# Altium PCB Desafio_HW_Sillion.PcbDoc
Units mm, origin at the board's own origin, x right, y up, seen from the top; angles counter-clockwise.
Board outline 81.03 x 63.37 mm, 2 copper layers (Top Layer, Bottom Layer); 42 components, 35 nets, 136 pads, 18 vias.
Unrouted connection lines stored in the file: 2.
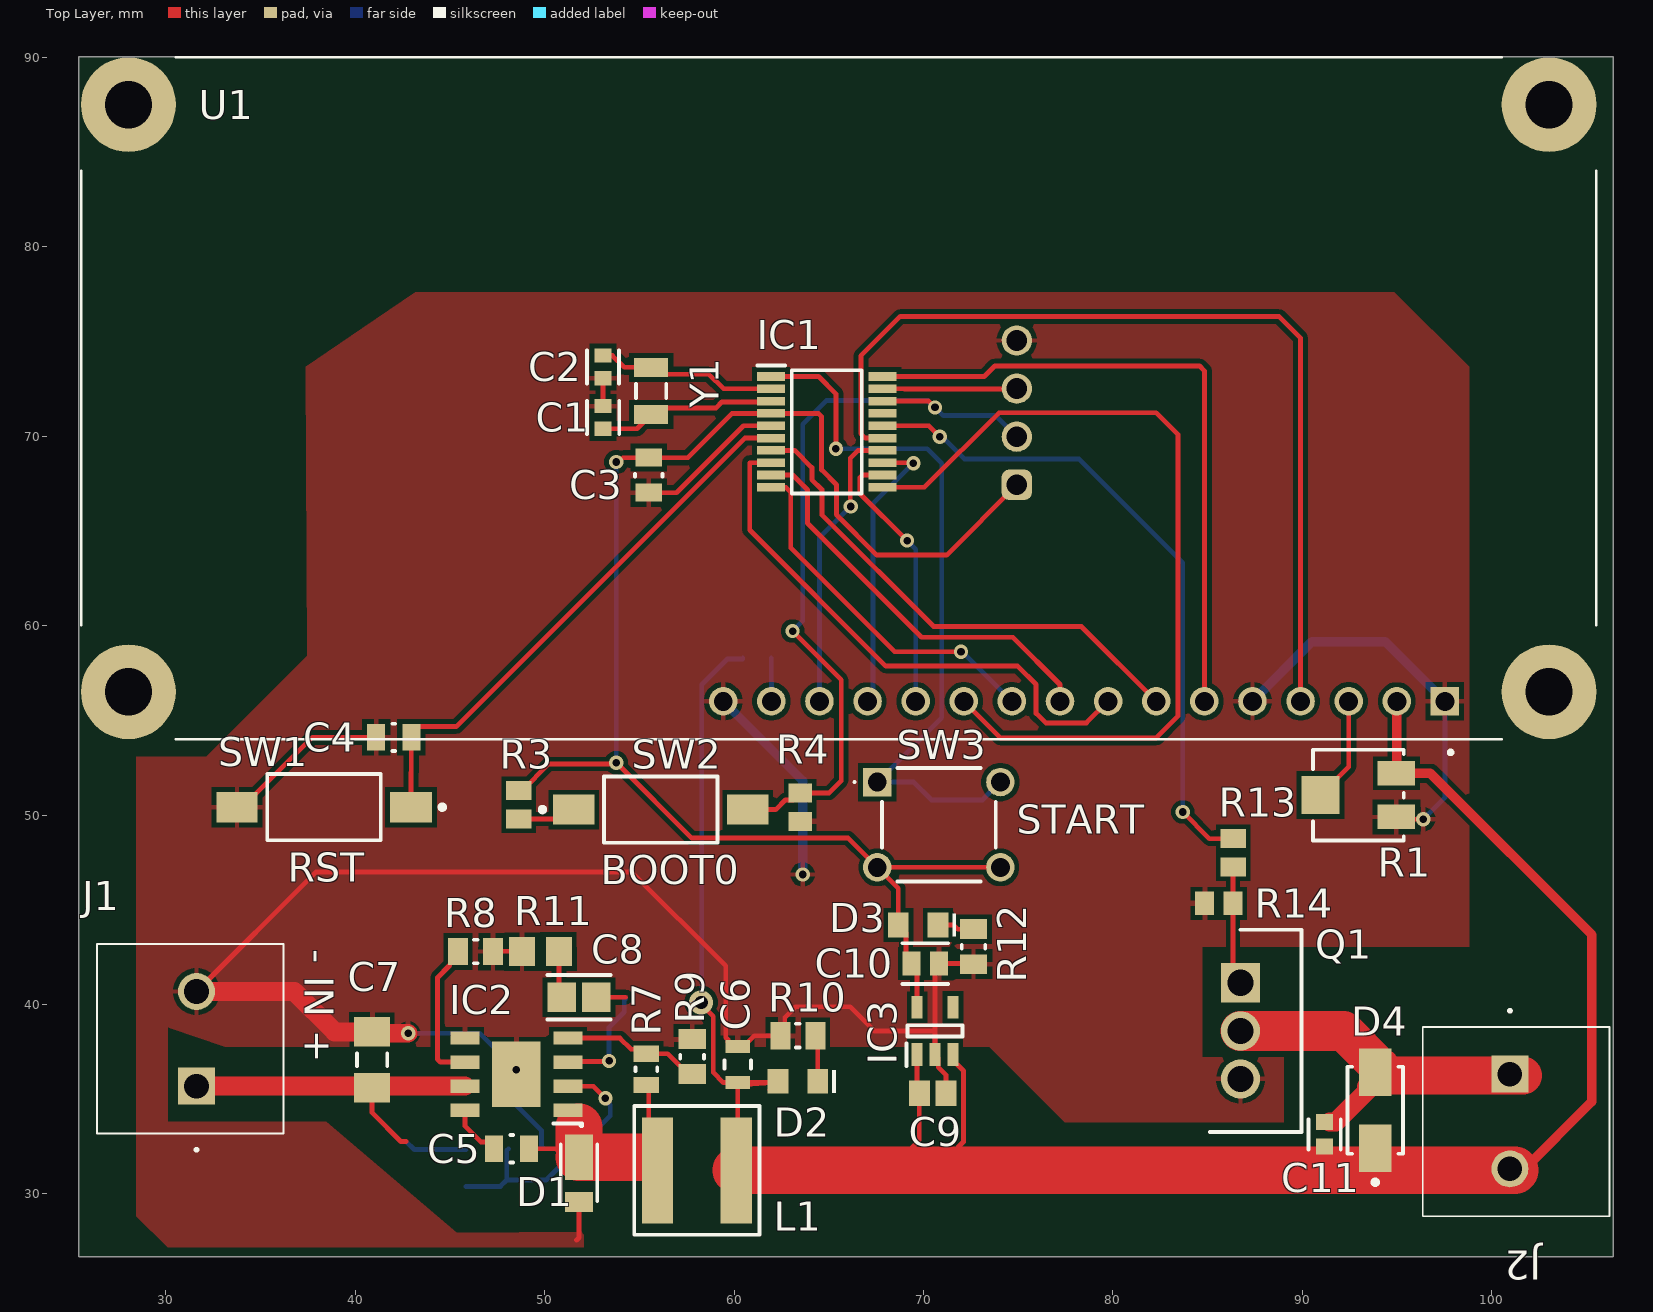
[diagram p0: Top Layer view]
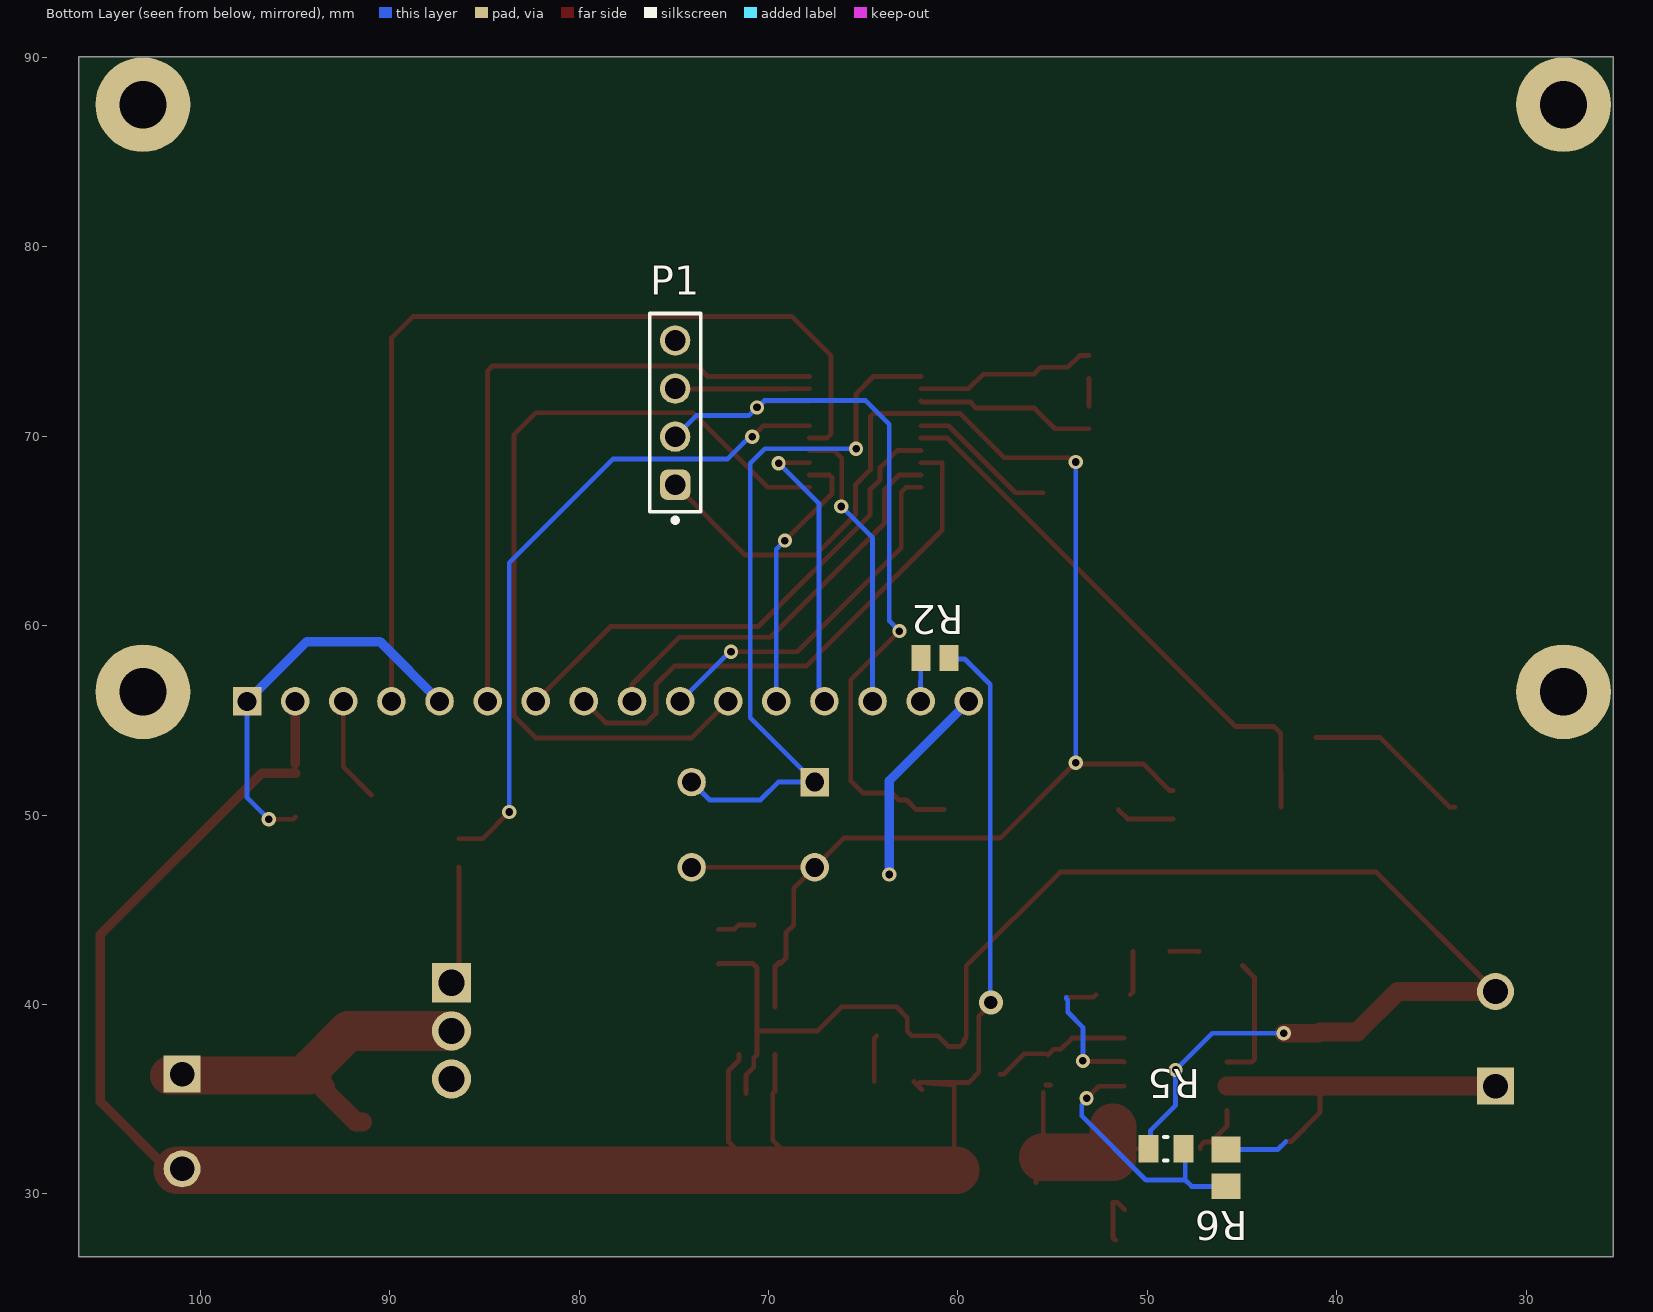
[diagram p1: Bottom Layer view, seen from below]
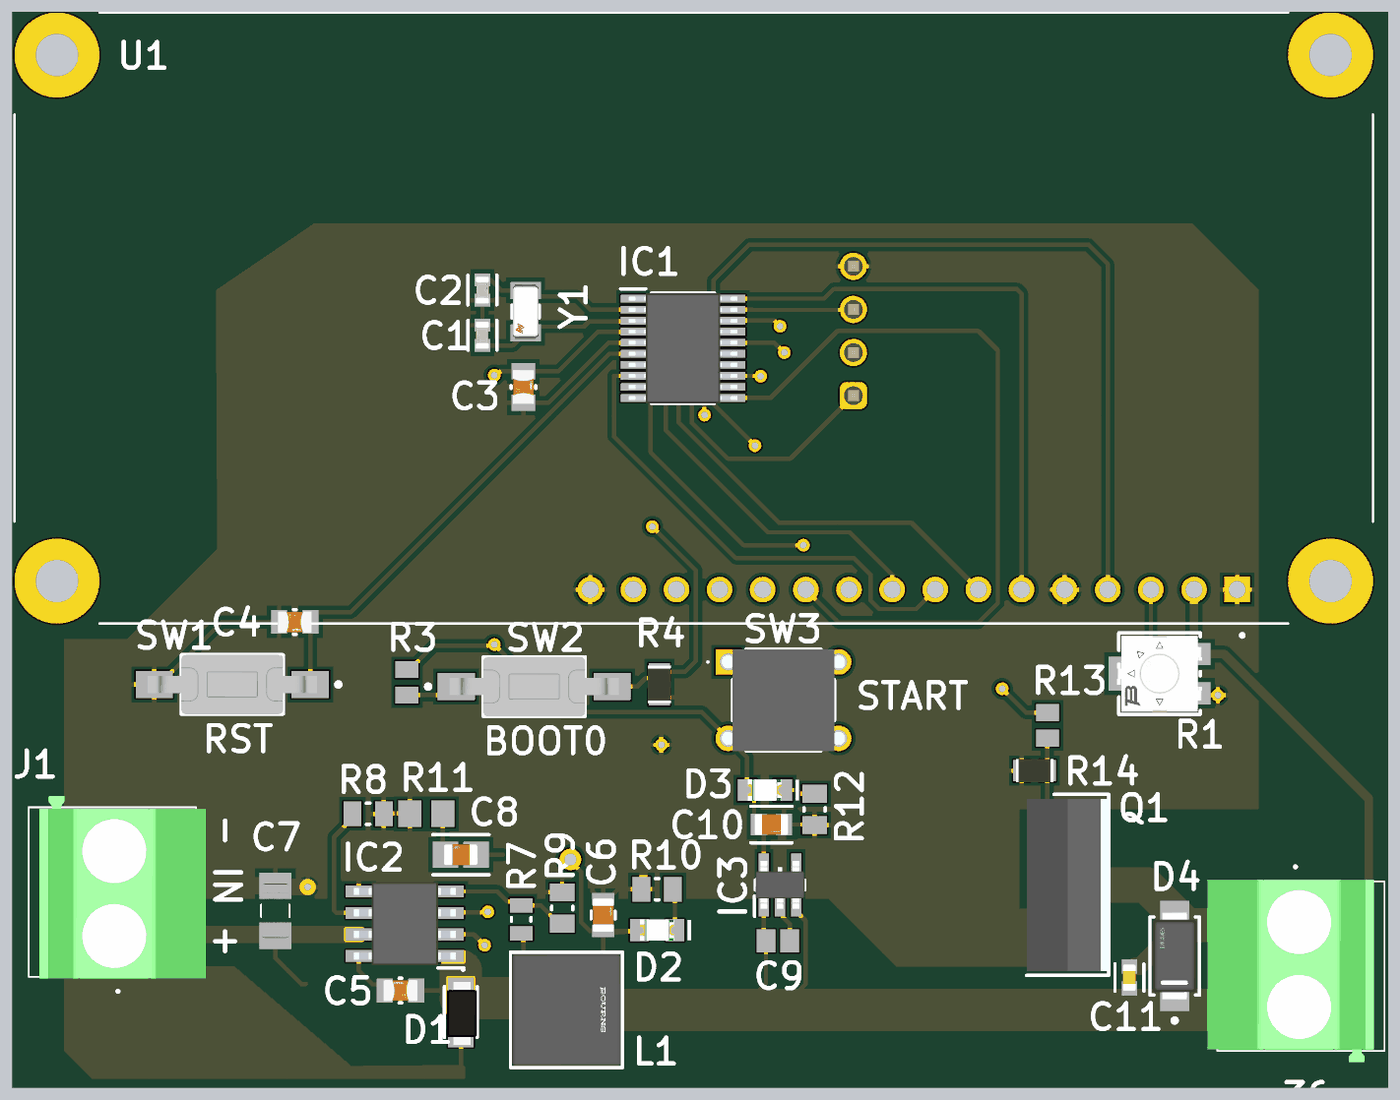
[diagram p2: 3D render of the assembled board from above, using the file's embedded part models]

## Layer stack, top to bottom
Top Solder: solder mask 0.0102, Solder Resist, Dk 3.5
Top Layer: signal copper 0.0356
Dielectric 1: dielectric 0.32, FR-4, Dk 4.8
Bottom Layer: signal copper 0.0356
Bottom Solder: solder mask 0.0102, Solder Resist, Dk 3.5

## Board outline
25.4,26.67 25.4,90.043 106.426,90.043 106.426,26.67

## Design rules (kind name [scope] priority, off if disabled: settings)
Clearance [All] p1: gap=0.254 ignorepadtopadclearanceinfootprint=FALSE
ComponentClearance ComponentClearance_1 [InComponent('U1')] p1: gap=0 collisioncheckmode=3 verticalgap=0 showdistances=FALSE donotcheckwithout3dbody=TRUE
ComponentClearance [All] p2: gap=0.254 collisioncheckmode=3 verticalgap=0.254 showdistances=FALSE
PolygonConnect [All] p1: connectstyle=Relief reliefconductorwidth=0.254 reliefentries=4 polygonreliefangle="90 Angle" airgapwidth=0.254
RoutingVias RoutingVias_1 [All] p1: holewidth=0.4 width=0.75 viastyle="Through Hole" minholewidth=0.4 minwidth=0.75 maxholewidth=0.4 maxwidth=0.75
RoutingVias [All] p2: holewidth=0.711 width=1.27 viastyle="Through Hole" minholewidth=0.711 minwidth=1.27 maxholewidth=0.711 maxwidth=1.27
SolderMaskExpansion [All] p1: expansion=0.102 istentingtop=FALSE
SupplyNets "Schematic Supply Nets_2" [InNet('GND')] p1: voltage=0.000
SupplyNets "Schematic Supply Nets_1" [InNet('3V3')] p2: voltage=0.000
SupplyNets "Schematic Supply Nets" [InNet('5V')] p3: voltage=0.000
Width [All] p1: maxlimit=2.5 minlimit=0.2 preferedwidth=0.254 minimp=50.000000 maximp=50.000000 favimp=50.000000
29 further rules are at their usual default settings.

## Classes and differential pairs
component class PWR: C5 C6 C7 C8 C9 C10 D1 D2 D3 IC2 IC3 J1 L1 R5 R6 R7 R8 R9 R10 R11 R12
component class MCU: C1 C2 C3 C4 C11 D4 IC1 J2 P1 Q1 R1 R2 R3 R4 R13 R14 SW1 SW2 SW3 U1 Y1

## Components (designator, comment, footprint, x,y, rotation, side; value= is the part's Value field where it differs from the comment)
C1 "12pF" FP-C0603C-CF-MFG 53.086,70.993 r90 top value="12 pF"
C2 "12pF" FP-C0603C-CF-MFG 53.086,73.66 r270 top value="12 pF"
C3 "100nF" FP-CC0805-0_85-MFG 55.499,67.945 r90 top value="100 nF"
C4 "100nF" FP-CC0805-0_85-MFG 42.037,54.102 r0 top value="100 nF"
C5 "100nF" FP-CC0805-0_85-MFG 48.26,32.385 r180 top value="100 nF"
C6 "22uF/6.3V" FP-GRM21B-0_15-MFG 60.198,36.83 r90 top
C7 "10uF/50V" FP-GRM31-0_2-IPC_A 40.894,37.084 r90 top value=10uF
C8 "150pF" FP-0805-L_2_01_0_2-W_1_25-IPC_A 51.816,40.386 r180 top
C9 "1uF" CAPC2013X140X50LL20T25 70.485,35.306 r180 top
C10 "10uF" FP-GRM21B-0_1-IPC_C 70.104,42.164 r0 top
C11 "0.1uF" FP-C0603-CJ-MFG 91.186,33.147 r90 top value=100nF
D1 "SBR2A40P1-7" POWERDI123_1 51.816,31.115 r90 top
D2 "" WL-SMCW_0805_150080xx75000 63.373,35.941 r180 top
D3 "" WL-SMCW_0805_150080xx75000 69.723,44.196 r180 top
D4 "SBRT5A50SA-13" FP-SMA-MFG 93.853,34.417 r90 top
IC1 "STM32C011F6P6TR" SOP65P640X120-20N 64.897,70.231 r0 top
IC2 "MP2560DN-LF" SOIC127P600X170-9N 48.514,36.322 r180 top
IC3 "TLV74033PDBVR" SOT95P280X145-5N 70.612,38.608 r90 top
J1 "1715022" 1715022 31.623,35.687 r90 top
J2 "MOTOR" 1715022 100.965,36.322 r270 top
L1 "22uH" FP-SRP6060FA-MFG 58.039,31.242 r180 top
P1 "HEADER 4P" 61300411121 74.93,71.247 r90 bottom
Q1 "IRLB8721PBF" TO254P483X1016X1994-3P 86.741,41.148 r270 top
R1 "10K" FP-3314J-1-MFG 92.964,51.054 r90 top
R2 "330R" RESC2013X60X40LL20T25 61.214,58.293 r180 bottom
R3 "330" RESC2013X60X40LL20T25 48.641,50.546 r90 top
R4 "10K" RESC2013X60X40LL20T25_A 63.5,50.419 r90 top
R5 "17.4K" RESC2013X50X30NL20T20 49.022,32.385 r180 bottom
R6 "100K" RESC2013X70X40ML20T20 45.847,31.369 r90 bottom
R7 "210K" RESC2013X50X30LL20T20 55.372,36.576 r270 top
R8 "200K" RESC2013X50X30NL20T20 46.355,42.799 r180 top
R9 "40.2K" RESC2013X50X30NL20T20 57.785,37.247 r270 top
R10 "1K" RESC2013X50X30NL20T20 63.373,38.354 r0 top
R11 "100K" RESC2013X70X40ML20T20 49.784,42.799 r0 top
R12 "1K" RESC2013X50X30NL20T20 72.644,43.053 r90 top
R13 "330" RESC2013X60X40LL20T25 86.36,48.006 r90 top
R14 "10K" RESC2013X60X40LL20T25_A 85.598,45.339 r0 top
SW1 "RESET" TECO-FSMSM-2_V 38.354,50.419 r180 top
SW2 "BOOT0" TECO-FSMSM-2_V 56.134,50.292 r0 top
SW3 "Long Shaft SW" TS0266130BK160LCRD 67.564,51.744 r0 top
U1 "LCD2X16" LCD_LCD2X16 65.532,72.009 r180 top
Y1 "32.768K" FP-NX3215SA-MFG 55.626,72.39 r270 top

## Footprints (in the part's own frame and the unit in brackets; to place one, negate y for a bottom-side part, rotate by r counter-clockwise, add the part's x,y. Pads: shape width x height; smd on the part's side, far side on the other; paste and mask are expansions set on the pad)
1715022 [mm]
  rect 1.95x1.95 hole 1.3: 1(0,0)
  round 1.95 hole 1.3: 2(5,0)
  silkscreen extent -3.4,-4.6 7.5,5.25, body extent -2.59,-5.18 8.15,4.62, height 14.3
61300411121 [mm] "Pin Header, pitch 2.54 mm, THT, Vertical, single row, 4p"
  rrect50% 1.6x1.6 hole 1.1: 1(-3.81,0)
  round 1.6 hole 1.1: 2(-1.27,0) 3(1.27,0) 4(3.81,0)
  silkscreen extent -5.8,-1.34 5.23,1.34, body extent -5.08,-1.27 5.08,1.27, height 8.57
CAPC2013X140X50LL20T25 [mm] "Chip Capacitor, 2-Leads, Body 2.00x1.25mm, IPC High Density"
  rect 1.1x1.35 smd: 1(-0.7,0) 2(0.7,0)
  body extent -1.1,-0.72 1.1,0.72, height 1.4
FP-0805-L_2_01_0_2-W_1_25-IPC_A [mm]
  rect 1.505x1.556 smd paste+0 mask+0: 1(-0.906,0) 2(0.906,0)
  silkscreen extent -1.66,-1.18 1.66,1.18, body extent -2.16,-1.28 2.16,1.28, height 0.25
FP-3314J-1-MFG [mm]
  rect 1.3x2 smd paste+0 mask+0: 1(1.15,-2) 3(-1.15,-2)
  rect 2x2 smd paste+0 mask+0: 2(0,2)
  silkscreen extent -2.4,-2.4 2.4,2.4, body extent -2.5,-3.1 2.5,3.1, height 0.25
FP-C0603-CJ-MFG [mm]
  rect 0.85x0.9 smd paste+0 mask+0: 1(-0.65,0) 2(0.65,0)
  silkscreen extent -0.8,-0.85 0.8,0.85, body extent -1.2,-0.6 1.2,0.6, height 0.25
FP-C0603C-CF-MFG [mm]
  rect 0.75x0.9 smd paste+0 mask+0: 1(-0.6,0) 2(0.6,0)
  silkscreen extent -0.87,-0.85 0.88,0.85, body extent -1.2,-0.6 1.2,0.6, height 0.25
FP-CC0805-0_85-MFG [mm]
  rect 0.95x1.4 smd paste+0 mask+0: 1(-0.925,0) 2(0.925,0)
  silkscreen extent -0.07,-0.73 0.07,0.73, body extent -1.6,-1.05 1.6,1.05, height 0.25
FP-GRM21B-0_1-IPC_C [mm]
  rect 0.958x1.262 smd paste+0 mask+0: 1(-0.727,0) 2(0.727,0)
  silkscreen extent -1.21,-1.07 1.21,1.07, body extent -1.31,-0.77 1.31,0.77, height 0.25
FP-GRM21B-0_15-MFG [mm]
  rect 0.7x1.3 smd paste+0 mask+0: 1(-0.95,0) 2(0.95,0)
  silkscreen extent -0.22,-0.7 0.22,0.7, body extent -1.4,-0.8 1.4,0.8, height 0.25
FP-GRM31-0_2-IPC_A [mm]
  rect 1.555x1.906 smd paste+0 mask+0: 1(-1.476,0) 2(1.476,0)
  silkscreen extent -0.32,-0.8 0.32,0.8, body extent -2.75,-1.45 2.75,1.45, height 0.25
FP-NX3215SA-MFG [mm]
  rect 1x1.8 smd paste+0 mask+0: 1(-1.25,0) 2(1.25,0)
  silkscreen extent -0.38,-0.8 0.38,0.8, body extent -1.85,-1 1.85,1, height 0.25
FP-SMA-MFG [mm]
  rect 2.5x1.7 smd paste+0 mask+0: 1(-2,0) 2(2,0)
  silkscreen extent -3.92,-1.46 2.3,1.46, body extent -3.35,-1.56 3.35,1.56, height 0.25
FP-SRP6060FA-MFG [mm]
  rect 1.65x5.6 smd paste+0 mask+0: 1(-2.075,0) 2(2.075,0)
  silkscreen extent -3.3,-3.4 3.3,3.4, body extent -3.4,-3.5 3.4,3.5, height 0.25
LCD_LCD2X16 [mm]
  rect 1.508x1.508 hole 1: 1(-32,16)
  round 1.508 hole 1: 2(-29.46,16) 3(-26.92,16) 4(-24.38,16) 5(-21.84,16) 6(-19.3,16) 7(-16.76,16) 8(-14.22,16) 9(-11.68,16) 10(-9.14,16) 11(-6.6,16) 12(-4.06,16) 13(-1.52,16) 14(1.02,16) 15(3.56,16) 16(6.1,16)
  round 5 hole 2.5: S1(-37.5,15.5) S2(37.5,15.5) S3(37.5,-15.5) S4(-37.5,-15.5)
  silkscreen extent -40,-18 40,18.8
POWERDI123_1 [mm]
  rect 2.4x1.5 smd: 1(0.825,0)
  rect 1.05x1.5 smd: 2(-1.55,0)
  silkscreen extent -1.5,-0.96 2.56,0.96, body extent -1.93,-0.95 1.77,0.83, height 0.98
RESC2013X50X30LL20T20 [mm] "Chip Resistor, 2-Leads, Body 2.00x1.25mm, IPC High Density"
  rect 0.85x1.35 smd: 1(-0.825,0) 2(0.825,0)
  silkscreen extent -0.1,-0.58 0.1,0.58, body extent -1.1,-0.72 1.1,0.72, height 0.5
RESC2013X50X30NL20T20 [mm] "Chip Resistor, 2-Leads, Body 2.00x1.25mm, IPC Medium Density"
  rect 1.05x1.45 smd: 1(-0.925,0) 2(0.925,0)
  silkscreen extent -0.1,-0.62 0.1,0.62, body extent -1.1,-0.72 1.1,0.72, height 0.5
RESC2013X60X40LL20T25 [mm] "Chip Resistor, 2-Leads, Body 2.00x1.25mm, IPC High Density"
  rect 1x1.35 smd: 1(-0.75,0) 2(0.75,0)
  body extent -1.1,-0.72 1.1,0.72, height 0.6
RESC2013X60X40LL20T25_A [mm] "Chip Resistor, 2-Leads, Body 2.20x1.35mm, IPC High Density"
  rect 1x1.25 smd: 1(-0.75,0) 2(0.75,0)
  body extent -1.1,-0.67 1.1,0.67, height 0.6
RESC2013X70X40ML20T20 [mm] "Chip Resistor, 2-Leads, Body 2.00x1.25mm, IPC Low Density"
  rect 1.35x1.55 smd: 1(-0.975,0) 2(0.975,0)
  body extent -1.1,-0.72 1.1,0.72, height 0.7
SOIC127P600X170-9N [mm]
  rect 1.525x0.7 smd: 1(-2.712,1.905) 2(-2.712,0.635) 3(-2.712,-0.635) 4(-2.712,-1.905) 5(2.712,-1.905) 6(2.712,-0.635) 7(2.712,0.635) 8(2.712,1.905)
  rect 2.56x3.45 smd: 9(0,0)
  silkscreen extent -3.48,2.61 -1.95,2.61, body extent -3,-2.45 3,2.45, height 1.7
SOP65P640X120-20N [mm]
  rect 1.475x0.45 smd: 1(-2.938,2.925) 2(-2.938,2.275) 3(-2.938,1.625) 4(-2.938,0.975) 5(-2.938,0.325) 6(-2.938,-0.325) 7(-2.938,-0.975) 8(-2.938,-1.625) 9(-2.938,-2.275) 10(-2.938,-2.925) 11(2.938,-2.925) 12(2.938,-2.275) 13(2.938,-1.625) 14(2.938,-0.975) 15(2.938,-0.325) 16(2.938,0.325) 17(2.938,0.975) 18(2.938,1.625) 19(2.938,2.275) 20(2.938,2.925)
  silkscreen extent -3.67,-3.25 1.85,3.5, body extent -3.2,-3.25 3.2,3.25, height 1.2
SOT95P280X145-5N [mm]
  rect 1.2x0.6 smd: 1(-1.25,0.95) 2(-1.25,0) 3(-1.25,-0.95) 4(1.25,-0.95) 5(1.25,0.95)
  silkscreen extent -1.85,-1.45 0.3,1.5, body extent -1.4,-1.45 1.4,1.45, height 1.2
TECO-FSMSM-2_V [mm] "SMD, 2-Leads, Body 6x3.5mm, Pitch 9.19mm"
  rect 2.2x1.6 smd: 1(-4.595,0)
  rect 2.18x1.6 smd: 2(4.595,0)
  silkscreen extent -6.37,-1.75 3,1.75, body extent -4.98,-1.75 4.98,1.75, height 4.4
TO254P483X1016X1994-3P [mm]
  rect 2.07x2.07 hole 1.38: 1(0,0)
  round 2.07 hole 1.38: 2(2.54,0) 3(5.08,0)
  silkscreen extent -2.8,-1.61 7.88,3.22, body extent -2.54,-1.61 7.62,3.22, height 18.86
TS0266130BK160LCRD [mm]
  rect 1.5x1.5 hole 1: 1(0,0)
  round 1.5 hole 1: 2(6.5,0) 3(0,-4.5) 4(6.5,-4.5)
  silkscreen extent -1.25,-5.25 6.25,0.75, body extent -0.4,-5.25 6.9,0.75, height 13.3
WL-SMCW_0805_150080xx75000 [mm] "SMD Mono-color Chip LED, body 2.0x1.25mm"
  rect 1.1x1.3 smd: 1(-1.05,0) 2(1.05,0)
  silkscreen extent -2,-0.6 -1.8,0.6, body extent -1,-0.63 1,0.62, height 0.7

## Part data
C1 C2: library part CMP-2006-03703-3, "Ceramic Capacitor 12Pf 50V, C0G, 5%, 0603, Full Reel", Capacitance="12 pF", Manufacturer=KEMET, Manufacturer Part Number=C0603C120J5GACTU, Package=C0603C-CF, Temperature="-55°C to +125°C", Temperature Characteristic=C0G, Temperature Coefficient=30ppm/°C, Temperature Range High=+125°C, Temperature Range Low=-55°C, Tolerance=0.05, Voltage Rating="50 V", Automotive=Yes, Automotive Grade="Grade 1", Category=Cap, ComponentLink2Description=Datasheet, ComponentLink2URL=https://api.kemet.com/component-edge/download/datasheet/C0603C100J5GACAUTO.pdf, Device Class L1="Passive Components", Device Class L2=Capacitors, Device Class L3="Ceramic Capacitors", Digikey Description="Ceramic Capacitor 12Pf 50V, C0G, 5%, 0603, Full Reel", Height=0.87mm, Lead Free=Yes, Material=Ceramic, Mouser Description="Ceramic Capacitor 12Pf 50V, C0G, 5%, 0603, Full Reel", Octopart=https://octopart.com/c0603c120j5gactu-kemet-108780, RoHS=TRUE
C3 C4 C5: library part CMP-1036-04402-6, "CAP CER 0.1UF 16V X7R 0805", Capacitance="100 nF", Manufacturer=Yageo, Manufacturer Part Number=CC0805KRX7R7BB104, Package=CC0805-0.85, Temperature="-30°C to +85°C", Temperature Characteristic=X7R, Temperature Range High=+85°C, Temperature Range Low=-30°C, Tolerance=0.1, Voltage Rating="16 V", Automotive=No, Category=Cap, ComponentLink2Description=Datasheet, ComponentLink2URL=http://www.yageo.com/documents/recent/UPY-GPHC_Y5V_6.3V-to-50V_8.pdf, Device Class L1="Passive Components", Device Class L2=Capacitors, Device Class L3="Ceramic Capacitors", Digikey Description="CAP CER 0.1UF 16V X7R 0805", Footprint Url=http://www.yageo.com/exep/pages/download/literatures/UPY-C_GEN_24.pdf, Height=0.95mm, Ipc Land Pattern Name=CAPC200125X85, Lead Free=Yes, Material=Ceramic, Mouser Description="Multilayer Ceramic Capacitors MLCC - SMD/SMT 100nF 16V X7R 10%", Octopart=https://octopart.com/cc0805krx7r7bb104-yageo-39467769, RoHS=TRUE
C6: library part CMP-2007-03385-2, "Chip Multilayer Ceramic Capacitors for General Purpose, 0805, 22uF, X5R, 15%, 20%, 6.3V", Capacitance=22uF, Case Code (Imperial)=0805, Case Code (Metric)=2012, Dielectric=X5R, Max Operating Temperature=85°C, Min Operating Temperature=-55°C, Package Quantity=1, Tolerance=20%, Voltage=6.3V, Case/Package=0805, Depth=1.25mm, Height=1.25mm, Lead Free="Lead Free", Length=2mm, Material=Ceramic, Mount="Surface Mount", Packaging="Tape and Reel", Radiation Hardening=No, REACH SVHC="No SVHC", Termination=SMD/SMT, Thickness=0.053inch, Voltage Rating=6.3V, Voltage Rating (DC)=6.3V, Width=0.049inch
C7: library part CMP-2000-05256-2, "CAP CER 10UF 50V X5R 1206", Capacitance=10uF, Manufacturer="Murata Electronics North America", Manufacturer Part Number=GRM31CR61H106KA12L, Package=GRM31-0.2, Temperature="-55°C to +85°C", Temperature Characteristic=X5R, Temperature Coefficient=15%, Temperature Range High=+85°C, Temperature Range Low=-55°C, Tolerance=10%, Voltage Rating=50V, Automotive=No, Category=Cap, ComponentLink2Description=Datasheet, ComponentLink2URL=https://search.murata.co.jp/Ceramy/image/img/A01X/G101/ENG/GRM31CR61H106KA12-01A.pdf, Device Class L1="Passive Components", Device Class L2=Capacitors, Device Class L3="Ceramic Capacitors", Digikey Description="CAP CER 10UF 50V X5R 1206", Height=1.8mm, Lead Free=Yes, Material=Ceramic, Mouser Description="Multilayer Ceramic Capacitors MLCC - SMD/SMT 1206 10uF 50volt X5R +/-10%", Octopart=https://octopart.com/grm31cr61h106ka12l-murata-18903335, RoHS=TRUE
C8: library part CMP-2007-04281-2, "General Purpose Ceramic Capacitor, 0805, 150pF, 5%, C0G, 30ppm/°C, 50V", Case Code (Imperial)=0805, Case Code (Metric)=2012, Dielectric=C0G, Max Operating Temperature=125°C, Min Operating Temperature=-55°C, Package Quantity=1, Tolerance=5%, Voltage=50V, Capacitance=150pF, Case/Package=0805, Construction=Flat, Contact Plating=Tin, Depth=1.25mm, Lead Free="Lead Free", Length=2.01mm, Mount="Surface Mount", Number of Pins=2, Packaging="Tape and Reel", Radiation Hardening=No, REACH SVHC="No SVHC", RoHS Compliant=Yes, Series=-, Termination=SMD/SMT, Thickness=0.037inch, Voltage Rating=50V, Voltage Rating (DC)=50V, Width=0.049inch
C9: library part CMP-2007-03234-1, Manufacturer=Kemet, Part Number=C0805C105K3RACTU
C10: library part CMP-2007-03453-2, "Chip Multilayer Ceramic Capacitors for General Purpose, 0805, 10uF, X5R, 15%, 10%, 16V", Case Code (Imperial)=0805, Case Code (Metric)=2012, Dielectric=X5R, Max Operating Temperature=85°C, Min Operating Temperature=-55°C, Package Quantity=1, Tolerance=10%, Voltage=16V, Capacitance=10uF, Case/Package=0805, Depth=1.25mm, Height=1.25mm, Lead Free="Lead Free", Length=2mm, Material=Ceramic, Mount="Surface Mount", Packaging="Tape and Reel", Radiation Hardening=No, REACH SVHC="No SVHC", Termination=SMD/SMT, Thickness=0.053inch, Voltage Rating=16V, Voltage Rating (DC)=16V, Width=1.25mm
C11: library part CMP-2006-03300-2, "CAP CER 0.1UF 50V X7R 0603", Capacitance=100nF, Manufacturer=Kemet, Manufacturer Part Number=C0603X104K5RACTU, Package=C0603-CJ, Temperature="-55°C to +125°C", Temperature Characteristic=X7R, Temperature Coefficient=15%, Temperature Range High=+125°C, Temperature Range Low=-55°C, Tolerance=10%, Voltage=50V, Automotive=No, Category=Cap, ComponentLink2Description=Datasheet, ComponentLink2URL=https://content.kemet.com/datasheets/KEM_C1013_X7R_FT-CAP_SMD.pdf, Device Class L1="Passive Components", Device Class L2=Capacitors, Device Class L3="Ceramic Capacitors", Digikey Description="CAP CER 0.1UF 50V X7R 0603", Height=0.95mm, Ipc Land Pattern Name=CAPC16080X80, Lead Free=Yes, Material=Ceramic, Mouser Description="Capacitor; Ceramic; Cap 0.1uF; Tol+10%; SMT; Flexible Termination; Vol-Rtg 50V; TR", Octopart=https://octopart.com/c0603x104k5ractu-kemet-9145062, RoHS=TRUE, Voltage Rating=50V
D1: "Schottky Diode", Manufacturer_Name="Diodes Incorporated", Mouser Part Number=621-SBR2A40P1-7, Arrow Part Number=SBR2A40P1-7, Arrow Price/Stock=https://www.arrow.com/en/products/sbr2a40p1-7/diodes-incorporated?region=nac, Datasheet Link=https://www.diodes.com/assets/Datasheets/SBR2A40P1.pdf, Manufacturer_Part_Number=SBR2A40P1-7, Mouser Price/Stock=https://www.mouser.co.uk/ProductDetail/Diodes-Incorporated/SBR2A40P1-7?qs=KhBT%2FQof6UyH2neobXoDyQ%3D%3D
D2 D3: library part CMP-1426-00011-2, Case Code (Imperial)=0805, Case Code (Metric)=2012, Color=Red, Forward Current=100mA, Forward Voltage=2V, Max Operating Temperature=85°C, Max Reverse Voltage (DC)=5V, Min Operating Temperature=-40°C, Test Current=20mA, Case/Package=0805, Dominant Wavelength=625nm, Height=700µm, Length=2mm, Lens Style="Clear, Rectangular", Luminous Intensity=150mcd, Mount="Surface Mount", NexarPartId=29717781, Packaging="Tape and Reel", Peak Wavelength=630nm, REACH SVHC=Unknown, RoHS=Compliant, Viewing Angle=140°, Wavelength=625nm, Width=1.25mm
D4: library part CMP-12791-000002-1, "DIODE SBR 50V 5A SMA", Forward Current=5A, Manufacturer="Diodes Inc.", Max Junction Temp=+150°C, Max Repetitive Reverse Voltage=50V, Max Surge Forward Current=70A, Package=SMA, Peak Reverse Current=30uA, Temperature="-55°C to +150°C", Temperature Range Low=-55°C, Automotive=No, Category=Diode, ComponentLink2Description=Datasheet, ComponentLink2URL=https://www.diodes.com/assets/Datasheets/SBRT5A50SA.pdf, Device Class L1="Discrete Semiconductors", Device Class L2=Diodes, Device Class L3="Rectifier Diodes", Digikey Description="DIODE SBR 50V 5A SMA", Footprint Url=https://www.diodes.com/assets/Package-Files/SMA.pdf, Height=2.4mm, Lead Free=Yes, Manufacturer Part Number=SBRT5A50SA-13, Mouser Description="DIODE SBR 50V 5A SMA", Octopart=https://octopart.com/sbrt5a50sa-13-diodes+inc.-46962091, RoHS=TRUE, Standoff Height=0.05mm, Temperature Range High=+150°C
IC1: "Integrated Circuit", Manufacturer_Name=STMicroelectronics, Mouser Part Number=511-STM32C011F6P6TR, Arrow Part Number=STM32C011F6P6TR, Arrow Price/Stock=null?region=nac, Datasheet Link=https://www.st.com/resource/en/datasheet/stm32c011d6.pdf, Height=1.2mm, Manufacturer_Part_Number=STM32C011F6P6TR, Mouser Price/Stock=https://www.mouser.co.uk/ProductDetail/STMicroelectronics/STM32C011F6P6TR?qs=rQFj71Wb1eUlrPzOdA5ImQ%3D%3D
IC2: "Integrated Circuit", Manufacturer_Name="Monolithic Power Systems (MPS)", Mouser Part Number=946-MP2560DNLF, Datasheet Link=http://www.monolithicpower.com/DesktopModules/DocumentManage/API/Document/getDocument?id=1798, Height=1.7mm, Manufacturer_Part_Number=MP2560DN-LF, Mouser Price/Stock=https://www.mouser.co.uk/ProductDetail/Monolithic-Power-Systems-MPS/MP2560DN-LF?qs=rC7bBWoQAAleyiym%2FnQvhQ%3D%3D
IC3: "Integrated Circuit", Manufacturer_Name="Texas Instruments", Mouser Part Number=595-TLV74033PDBVR, Arrow Part Number=TLV74033PDBVR, Arrow Price/Stock=null?region=nac, Datasheet Link=https://www.ti.com/lit/ds/symlink/tlv740p.pdf?ts=1599647884466&ref_url=https%253A%252F%252Fwww.ti.com%252Fpower-management%252Flinear-regulators-ldo%252Fproducts.html, Height=1.45mm, Manufacturer_Part_Number=TLV74033PDBVR, Mouser Price/Stock=https://www.mouser.co.uk/ProductDetail/Texas-Instruments/TLV74033PDBVR?qs=sPbYRqrBIVkaG2WMvPh1eg%3D%3D
J1: "Connector", Manufacturer_Name="Phoenix Contact", Mouser Part Number=651-1715022, Arrow Part Number=1715022, Arrow Price/Stock=null?region=nac, Datasheet Link=http://www.phoenixcontact.com/de/produkte/1715022/pdf, Height=13.85mm, Manufacturer_Part_Number=1715022, Mouser Price/Stock=https://www.mouser.co.uk/ProductDetail/Phoenix-Contact/1715022?qs=A%2FKWGUWTCZi6QclA%252B6CJ3A%3D%3D
J2: library part 1715022, "Connector", Manufacturer_Name="Phoenix Contact", Mouser Part Number=651-1715022, Arrow Part Number=1715022, Arrow Price/Stock=null?region=nac, Datasheet Link=http://www.phoenixcontact.com/de/produkte/1715022/pdf, Height=13.85mm, Manufacturer_Part_Number=1715022, Mouser Price/Stock=https://www.mouser.co.uk/ProductDetail/Phoenix-Contact/1715022?qs=A%2FKWGUWTCZi6QclA%252B6CJ3A%3D%3D
L1: library part CMP-07248-000025-2, "IND,6.6X6.4X5.8MM,22UH,20%,5A,SH", Case/Package=Nonstandard, Current Rating=5A, DC Resistance (DCR)=60.5mR, Max Operating Temperature=155°C, Min Operating Temperature=-55°C, Ratings=AEC-Q200, Saturation Current=5.6A, Self Resonant Frequency=10MHz, Test Frequency=100kHz, Tolerance=20%, Composition=Wirewound, Core Material=Ferrite, Inductance=22uH, Mount="Surface Mount", Packaging="Tape and Reel", Shielding=Shielded
P1: library part CMP-1502-01064-3, Color=Black, Contact Resistance=20mΩ, Current Rating=3A, Max Operating Temperature=105°C, Min Operating Temperature=-40°C, Operating Supply Voltage=250V, Connector Type="Male Pin", Contact Material=Copper, Contact Mating Length=5.9944mm, Contact Plating=Gold, Gender=Male, Height=8.89mm, Lead Free="Lead Free", Lead Pitch=2.54mm, Mount="Through Hole", NexarPartId=32855522, Number of Contacts=4, Number of Pins=4, Number of Positions=4, Number of Rows=1, Orientation=Vertical, Packaging=Bulk, Pitch=2.54mm, REACH SVHC=Unknown, RoHS=Compliant, Termination=Solder, Voltage Rating=250V
Q1: "MOSFET (N-Channel)", Manufacturer_Name=Infineon, Mouser Part Number=942-IRLB8721PBF, Arrow Part Number=IRLB8721PBF, Arrow Price/Stock=https://www.arrow.com/en/products/irlb8721pbf/infineon-technologies-ag?region=europe, Datasheet Link=http://uk.rs-online.com/web/p/products/7259322, Height=4.83mm, Manufacturer_Part_Number=IRLB8721PBF, Mouser Price/Stock=https://www.mouser.co.uk/ProductDetail/Infineon-Technologies/IRLB8721PBF?qs=9%252BKlkBgLFf0T58WYx%2FAl5A%3D%3D
R1: library part CMP-07234-000035-1, "TRIMMER 10K OHM 0.25W J LEAD TOP", RoHS Compliant=Yes
R2 R3 R13: library part CMP-2001-00628-1, Manufacturer=Panasonic, Part Number=ERA6AEB331V
R4 R14: library part CMP-2001-00582-2, "Metal Film Chip Resistor, High Reliability Type, 0.125 W, +/- 0.1%, -55 to 155 degC, 0805 (2012 Metric), RoHS, Tape and Reel", Case Code - in=0805, Case Code - mm=2012, Manufacturer=Panasonic, Operating Temperature Range=-55Cto+155C, Package / Case=0805(2012metric), Package Description="2-Pin Surface Mount Device, Body 2 x 1.25 mm", Power Rating=125mW(1/8W), Resistance=10kOhms, Temperature Coefficient=25PPM/C, Tolerance=0.1%, Voltage Rating=100V, Brand=Panasonic, Datasheet URL=https://industrial.panasonic.com/cdbs/www-data/pdf/RDM0000/AOA0000C307.pdf, Datasheet Version=02/2016, Factory Pack Quantity=5000, Height=0.5mm, Length=2mm, Manufacturer URL=http://www.panasonic.com/, Mounting Technology=SurfaceMount, Package Reference=0805, Packaging=Reel, Product=ThinFilmResistorsSMD, Product Category=ThinFilmResistors-SMD, RoHS=Details, Series=ERA-6A, Termination Style=SMD/SMT, Type=MetalFilmChipResistors, Width=1.25mm
R5: library part CMP-2001-04989-1, Manufacturer="Vishay Dale", Part Number=CRCW080517K4FKEA
R6 R11: library part CMP-2001-04377-1, Manufacturer=Panasonic, Part Number=ERJ-6ENF1003V
R7: library part CMP-1013-00770-2, Manufacturer="Vishay Dale", Part Number=CRCW0805210KFKEA
R8: library part CMP-2001-03660-1, Manufacturer="Vishay Dale", Part Number=CRCW0805200KFKEA
R9: library part CMP-2001-03903-1, Manufacturer="Vishay Dale", Part Number=CRCW080540K2FKEA
R10 R12: library part CMP-1013-00510-2, Manufacturer="Vishay Dale", Part Number=CRCW08051K00FKEA
SW1 SW2: library part CMP-2000-07511-1, "FSMSM Push Button Switch, 50 mA, -35 to 85 degC, 2-Pin SMD, RoHS, Bulk", Case\/Package=SMD/SMT, Contact Current Rating=50mA, Contact Resistance=100mOhm, Manufacturer="TE Connectivity", Max Operating Temperature=85degC, Max Voltage Rating (DC)=12V, Min Operating Temperature=-35degC, Operating Force=180gf, Package Description="2-Pin Surface Mount Device, Body 6 x 3.5 mm, Pitch 9.19 mm", Package Quantity=1000, Package Reference=FSMSM, Voltage Rating (DC)=24V, Actuator Length=1.07mm, Actuator Material=Polyamide, Contact Material=Brass, Contact Plating=Silver, Current Rating=50mA, Datasheet URL=http://www.te.com/commerce/DocumentDelivery/DDEController?Action=showdoc&DocId=Customer+Drawing%7F1437566-3%7FC2%7Fpdf%7FEnglish%7FENG_CD_1437566-3_C2_1437566_3_1_c.dwg.pdf%7F1437566-3, Datasheet Version="Rev. C2, 08/2014", Electrical Life=20000Cycles, ELV=Compliant, Illumination Type=Illuminated, Lead Free=LeadFree, Manufacturer URL=http://www.te.com/, Mechanical Life=20000Cycles, Mount=SurfaceMount, Mounting Technology=SurfaceMount, Orientation=Straight, Packaging=LoosePiece, REACH SVHC=Unknown, RoHSCompliant=true, Switch Travel=0.25mm, Termination=GullWing, Throw Configuration=SPST
SW3: library part TS02-66-130-BK-160-LCR-D, "Integrated Circuit", Manufacturer_Name="CUI Devices", Mouser Part Number=179-TS0266130BK160LC, Datasheet Link=https://www.cuidevices.com/product/resource/ts02.pdf, Height=13.2mm, Manufacturer_Part_Number=TS02-66-130-BK-160-LCR-D, Mouser Price/Stock=https://www.mouser.co.uk/ProductDetail/CUI-Devices/TS02-66-130-BK-160-LCR-D?qs=A6eO%252BMLsxmRpI4OEfaqDHA%3D%3D
U1: "Display; Display: LCD 2x16 characters (blue backlight)", Package=None, Availability=Unavailable, MP=LCD2X16, Price=None
Y1: library part CMP-200220-000010-1, "CRYSTAL 32.7680KHZ 12.5PF SMD", Case/Package=SMD/SMT, ESR (Equivalent Series Resistance)=70kR, Frequency=32.768kHz, Frequency Tolerance=20ppm, Load Capacitance=12.5pF, Max Operating Temperature=125°C, Min Operating Temperature=-40°C, Package Quantity=1000, Height=0.035inch, Length=0.126inch, Mount="Surface Mount", Number of Pins=2, Packaging="Tape and Reel", Width=0.059inch

## Via types
v1: diameter 0.75, hole 0.4, Top Layer to Bottom Layer, 17 vias
v2: diameter 1.27, hole 0.711, Top Layer to Bottom Layer, 1 vias

## Nets (pads, with @x,y where several pads share a name; then routed paths per layer and width w, separated by ;. In a path a pad name is that pad's centre, name@x,y a point inside that pad or via, vN(x,y) a via of type N, cw(c..) or ccw(c..) an arc to the next point about the centre after c; other vN are vias at no path point)
3V3: C3.2 C10.1 D3.2 IC1.4 IC3.5 P1.1 R3.2 SW3.3 SW3.4 | length 81.5
  Top Layer w0.254: R3.2 48.816,51.296 50.225,52.705 53.848,52.705 57.765,48.788 66.02,48.788 SW3.3 ; 54.145,68.87 C3.2 57.564,68.87 59.9,71.206 IC1.4 64.458,71.206 64.624,71.04 64.624,68.224 65.411,67.437 65.411,65.856 67.539,63.729 71.222,63.729 P1.1 ; IC3.5 69.662,42.006 69.435,42.233 C10.1 69.088,42.453 69.088,43.781 D3.2 68.673,46.135 SW3.3 ; SW3.4 SW3.3
  Bottom Layer w0.254: v1(53.785,52.768) v1(53.785,68.644)
5V: C6.1 C9.2 C11.1 D2.2 D4.1 IC3.1 IC3.3 J2.2 L1.1 R1.1 R2.2 U1.2 | length 119.1
  Top Layer w0.254: v2(58.268,40.107) 58.268,40.005 58.903,39.37 58.903,36.413 59.436,35.88 C6.1 62.027,35.88 60.207,35.754 60.198,35.753 60.198,31.326 L1.1 ; D2.2@61.9,35.499 62.323,35.922 D2.2 ; 68.199,31.242 69.785,32.828 C9.2 69.662,35.429 IC3.1 ; 71.501,32.131 72.116,32.746 72.116,36.504 71.562,37.058 IC3.3 ; R1.1 94.992,52.232 R1.1@94.992,52.709
  Top Layer w0.5: R1.1 96.767,52.204 105.283,43.688 105.283,34.878 J2.2@101.647,31.242 ; R1.1@94.992,52.709 U1.2
  Top Layer w2.5: L1.1 68.199,31.242 71.501,31.242 94.107,31.242 J2.2@101.219,31.242
  Bottom Layer w0.254: v2(58.268,40.107) 58.293,40.132 58.293,56.896 59.639,58.242 60.464,58.242 R2.2
DB0: IC1.7 U1.7 | length 27
  Top Layer w0.254: IC1.7 63.205,69.256 64.116,68.345 64.116,67.716 64.643,67.189 64.643,65.849 70.536,59.956 78.345,59.956 U1.7
DB1: IC1.8 U1.8 | length 29.2
  Top Layer w0.254: IC1.8 60.833,68.606 60.833,65.053 68.019,57.867 74.975,57.867 75.946,56.896 75.946,55.372 76.454,54.864 78.607,54.864 U1.8
DB2: IC1.9 U1.9 | length 21.8
  Top Layer w0.254: IC1.9 63.094,67.956 63.881,67.169 63.881,65.405 69.9,59.386 74.722,59.386 77.212,56.896 U1.9
DB3: IC1.10 U1.10 | length 19.1
  Top Layer w0.254: IC1.10 62.738,67.306 62.993,67.051 62.993,64.109 68.478,58.623 v1(71.984,58.623)
  Bottom Layer w0.254: v1(71.984,58.623) 72.058,58.623 U1.10
DB4: IC1.11 U1.11 | length 45.2
  Top Layer w0.254: IC1.11 70.053,67.306 73.994,71.247 82.296,71.247 83.439,70.104 83.439,55.22 82.296,54.077 74.064,54.077 U1.11
DB5: IC1.12 U1.12 | length 14.3
  Top Layer w0.254: IC1.12 66.788,67.956 66.65,67.818 66.65,66.979 v1(69.139,64.491)
  Bottom Layer w0.254: v1(69.139,64.491) 69.592,64.037 U1.12
DB6: IC1.13 U1.13 | length 15.2
  Top Layer w0.254: IC1.13 69.443,68.606 v1(69.469,68.58)
  Bottom Layer w0.254: U1.13 67.341,56.298 67.341,66.452 v1(69.469,68.58)
DB7: IC1.14 U1.14 | length 15.4
  Top Layer w0.254: v1(66.167,66.294) 66.142,66.319 66.142,68.85 66.548,69.256 IC1.14
  Bottom Layer w0.254: U1.14 64.512,64.639 v1(66.167,66.294)
DEN: IC1.20 U1.6 | length 34.8
  Top Layer w0.254: IC1.20 73.207,73.156 73.762,73.711 84.578,73.711 84.832,73.457 U1.6
DRS: IC1.15 U1.4 | length 49.1
  Top Layer w0.254: IC1.15 66.929,69.906 66.7,70.135 66.7,74.244 68.783,76.327 88.769,76.327 89.912,75.184 U1.4
EXT_SW: IC1.1 SW3.1 SW3.2 | length 38.1
  Top Layer w0.254: IC1.1 64.465,73.156 65.38,72.242 v1(65.38,69.342)
  Bottom Layer w0.254: v1(65.38,69.342) 70.206,69.342 70.968,68.58 70.968,55.148 SW3.1 69.482,51.744 70.426,50.8 73.12,50.8 SW3.2
GND: C1.2 C2.2 C3.1 C4.1 C6.2 C7.2 C9.1 C10.2 D1.2 IC1.5 IC2.5 IC2.9 IC3.2 J1.2 P1.4 Q1.3 R1.3 R4.1 R5.1 R8.1 R9.1 R10.1 R11.1 R12.1 R14.1 SW1.2 U1.1 U1.5 U1.16 | length 136.8
  Top Layer w0.254: J1.2 37.926,46.99 54.61,46.99 59.563,42.037 59.563,38.257 59.675,38.145 59.675,38.003 59.898,37.78 C6.2 60.498,37.78 61.072,38.354 R10.1 62.679,38.585 62.679,39.311 63.246,39.878 66.139,39.878 67.409,38.608 70.612,38.608 ; SW1.2 34.049,50.419 37.732,54.102 C4.1 ; C7.2 C7.2@40.973,38.481 ; R8.1 47.29,42.809 48.799,42.809 R11.1 ; IC2.9@48.191,35.999 IC2.9 ; D1.2@51.193,29.167 51.591,29.565 D1.2 51.816,27.686 51.689,27.559 ; C1.2 C2.2 ; C3.1 56.964,67.02 60.5,70.556 IC1.5 ; C9.1 71.185,36.296 70.785,36.696 70.785,37.185 IC3.2 70.612,38.608 ; R12.1 72.608,42.164 C10.2 70.612,41.945 70.612,38.608 ; R1.3 95.084,49.784 v1(96.393,49.784)
  Top Layer w1: J1.2 36.783,40.687 38.91,38.56 C7.2 ; C7.2@40.973,38.481 v1(42.799,38.481)
  Bottom Layer w0.254: v1(42.799,38.481) 46.578,38.481 v1(48.514,36.545) 48.514,34.671 49.843,33.342 49.843,32.489 R5.1 ; v1(96.393,49.784) 97.532,50.923 U1.1
  Bottom Layer w0.5: U1.16 63.627,51.814 v1(63.627,46.863) ; U1.5 90.52,59.157 94.384,59.157 U1.1
M_CTL: IC1.16 R13.2 | length 35.3
  Top Layer w0.254: IC1.16 70.287,70.556 v1(70.866,69.977) ; v1(83.693,50.165) 85.102,48.756 R13.2
  Bottom Layer w0.254: v1(70.866,69.977) 70.993,69.977 72.174,68.796 78.225,68.796 83.693,63.328 v1(83.693,50.165)
NetC1_1: C1.1 IC1.3 Y1.2 | length 9.5
  Top Layer w0.254: C1.1 54.879,70.393 Y1.2 55.987,71.501 59.055,71.501 59.366,71.812 61.915,71.812 IC1.3
NetC2_1: C2.1 IC1.2 Y1.1 | length 9.6
  Top Layer w0.254: C2.1 53.584,74.26 54.204,73.64 Y1.1 55.987,73.279 58.674,73.279 59.447,72.506 IC1.2
NetC5_1: C5.1 D1.1 IC2.1 L1.2 R7.2 | length 12.8
  Top Layer w0.254: C5.1@49.657,32.385 51.816,32.385 D1.1 ; R7.2@55.122,35.751 R7.2 ; L1.2@55.182,31.94 55.88,31.242 L1.2@55.88,30.607 ; R7.2@55.499,35.37 55.499,31.98 L1.2@55.539,31.94
  Top Layer w2.5: D1.1 55.182,31.94 L1.2@55.539,31.94 ; D1.1@51.816,32.385 51.816,33.528
NetC5_2: C5.2 IC2.8 | length 2.8
  Top Layer w0.254: IC2.8 45.802,33.573 46.628,32.747 46.987,32.747 47.208,32.526 C5.2@47.208,32.385
NetC7_1: C7.1 IC2.7 J1.1 R6.2 | length 21.3
  Top Layer w0.254: C7.1@40.815,35.687 C7.1 40.894,34.29 42.418,32.766 42.693,32.766
  Top Layer w1: J1.1 C7.1@40.815,35.687 ; C7.1 40.973,35.687 IC2.7
  Bottom Layer w0.254: 42.693,32.766 43.115,32.344 R6.2
NetC8_1: C8.1 IC2.3 | length 7.5
  Top Layer w0.254: IC2.3 51.258,36.989 53.372,36.989 v1(53.404,37.02) ; C8.1@52.722,40.513 52.849,40.386 54.283,40.386
  Bottom Layer w0.254: v1(53.404,37.02) 53.404,38.798 54.209,39.604 54.209,40.239 54.283,40.313 54.283,40.386
NetC8_2: C8.2 R11.2 | length 2.3
  Top Layer w0.254: R11.2 50.759,40.664 C8.2@50.91,40.513
NetC11_2: C11.2 D4.2 J2.1 Q1.2 | length 20
  Top Layer w0.254: D4.2 D4.2@94.028,36.242
  Top Layer w1: C11.2@91.44,33.797 91.774,33.797 D4.2@93.644,35.667 ; D4.2@93.39,35.667 93.503,35.667 93.853,36.017 D4.2
  Top Layer w2: D4.2@94.282,36.242 J2.1@101.647,36.242
  Top Layer w2.1: Q1.2 92.175,38.608 94.107,36.676 D4.2@94.107,36.417
NetD2_1: D2.1 R10.2 | length 2.5
  Top Layer w0.254: R10.2 64.423,38.229 D2.1
NetD3_1: D3.1 R12.2 | length 2
  Top Layer w0.254: D3.1 71.603,44.196 71.821,43.978 R12.2
NetIC2_2: IC2.2 R5.2 R6.1 | length 14.1
  Top Layer w0.254: IC2.2 52.578,35.687 v1(53.213,35.052)
  Bottom Layer w0.254: R6.1 47.666,30.394 48.006,30.734 ; R5.2 48.006,32.294 48.006,30.734 ; v1(53.213,35.052) 53.213,34.958 53.467,34.704 53.467,34.116 50.085,30.734 48.006,30.734
NetIC2_4: IC2.4 R7.1 R9.2 | length 7.2
  Top Layer w0.254: IC2.4 53.975,38.227 54.567,37.635 54.947,37.635 R7.1@55.245,37.337 ; R7.1 56.506,37.401 57.585,36.322 R9.2
NetIC2_6: IC2.6 R8.2 | length 6.7
  Top Layer w0.254: 44.98,42.059 44.345,41.424 44.345,37.106 44.494,36.957 IC2.6
NetQ1_1: Q1.1 R13.1 R14.2 | length 6.3
  Top Layer w0.254: R13.1 86.348,47.244 R14.2 86.348,41.541 Q1.1
NetR1_2: R1.2 U1.3 | length 5.6
  Top Layer w0.254: R1.2 92.452,52.542 U1.3
NetR2_1: R2.1 U1.15 | length 2.3
  Bottom Layer w0.254: R2.1 61.964,57.074 61.972,57.066 U1.15
NetR3_1: R3.1 SW2.1 | length 3.1
  Top Layer w0.254: R3.1 51.043,49.796 SW2.1
NRST: C4.2 IC1.6 SW1.1 | length 29.4
  Top Layer w0.254: SW1.1 42.949,52.242 42.962,52.255 C4.2 42.962,54.327 43.31,54.675 45.338,54.675 60.569,69.906 IC1.6
SWCLK: IC1.19 P1.3 | length 7.1
  Top Layer w0.254: IC1.19 68.972,72.506 68.986,72.492 74.905,72.492 P1.3
SWIO: IC1.18 P1.2 R4.2 SW2.2 | length 41.2
  Top Layer w0.254: SW2.2 62.2,50.292 62.704,50.796 63.127,50.796 R4.2 65.024,51.169 65.659,51.804 65.659,57.15 v1(63.094,59.715) ; IC1.18 70.282,71.856 v1(70.612,71.526)
  Bottom Layer w0.254: v1(63.094,59.715) 63.627,60.249 63.627,70.637 64.872,71.882 70.215,71.882 70.571,71.526 v1(70.612,71.526) 71.044,71.095 73.812,71.095 P1.2
pads on no net: IC1.17 IC3.4 U1.S1 U1.S2 U1.S3 U1.S4

## Polygon pours and split planes (outlines as drawn)
GND on Top Layer "GND_L01_P001" (solid, remove dead copper, pour order 1): 28.448,43.053 28.448,53.086 32.131,53.086 37.465,58.42 37.395,73.66 40.386,75.692 43.18,77.597 94.869,77.597 98.806,73.66 98.806,44.831 98.806,43.053
GND on Top Layer "GND_L01_P003" (solid, pour order 3): 30.099,40.738 30.099,33.807 38.481,33.807 45.365,27.941 52.07,27.998 52.07,27.178 30.099,27.178 28.448,28.829 28.448,40.738
GND on Top Layer "GND_L01_P000" (solid, remove dead copper, pour order 0): 33.123,37.78 30.226,38.735 28.448,39.525 28.448,44.577 31.75,47.879 83.312,47.879 84.709,46.482 84.709,41.148 84.709,37.211 89.027,37.211 89.027,33.782 77.47,33.782 73.472,37.78

## Silkscreen, mask and mechanical layers (free items; w line width, h text height)
Top Overlay:
  text "START" at 74.93,49.022 h1.52
  text "RST" at 36.449,46.482 h1.52
  text "BOOT0" at 52.959,46.355 h1.52
  text "- IN +" at 37.338,42.926 h1.52 r270